# Altium PCB Revolution.PcbDoc
Units mil, origin at the board's own origin, x right, y up, seen from the top; angles counter-clockwise.
Board outline 2695 x 2794.96 mil, 2 copper layers (Top Layer, Bottom Layer), stack 61.2 mil thick; 85 components, 79 nets, 338 pads, 28 vias.
Unrouted connection lines stored in the file: 13.
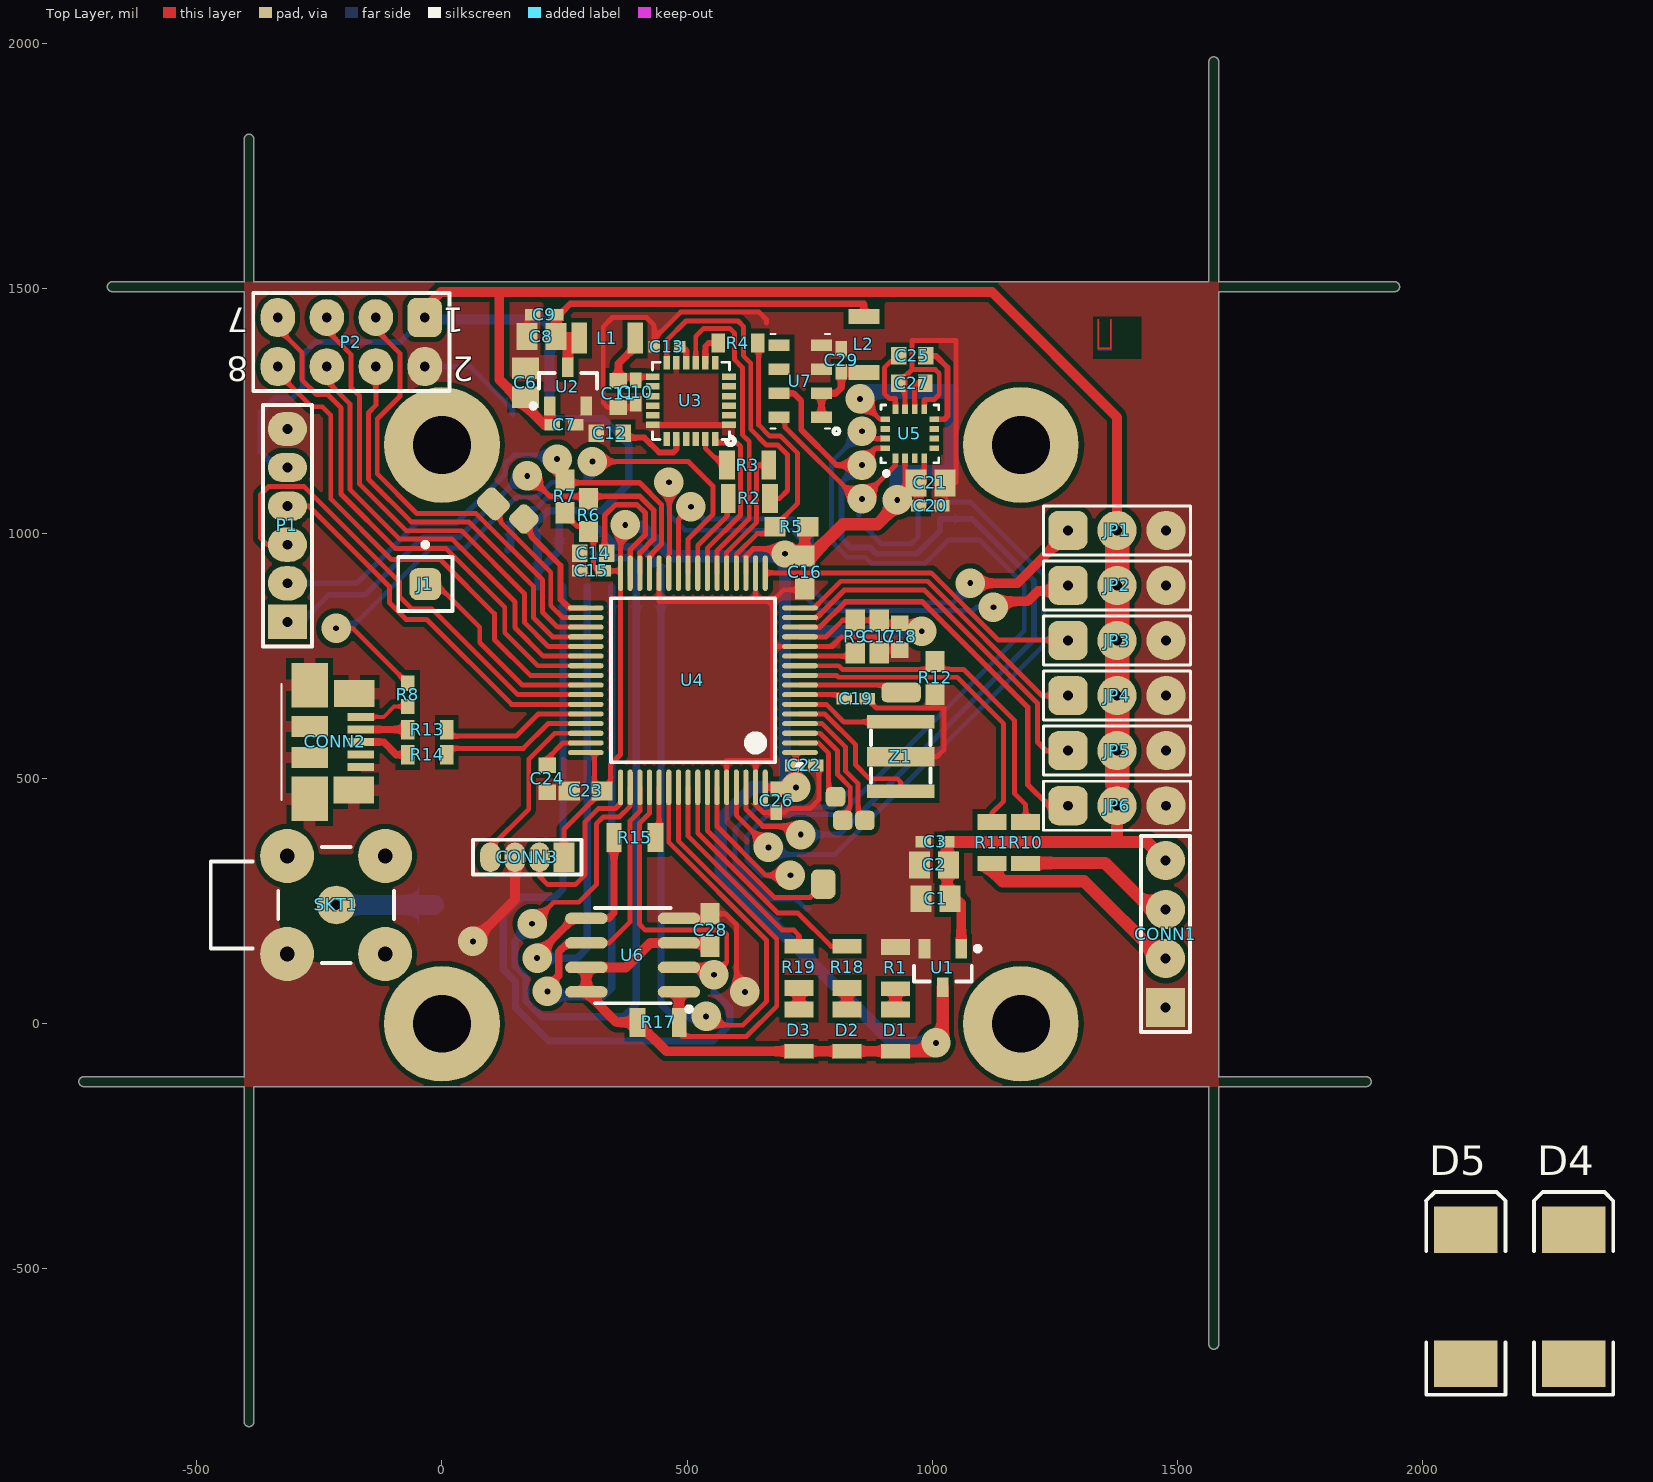
[diagram p0: Top Layer view]
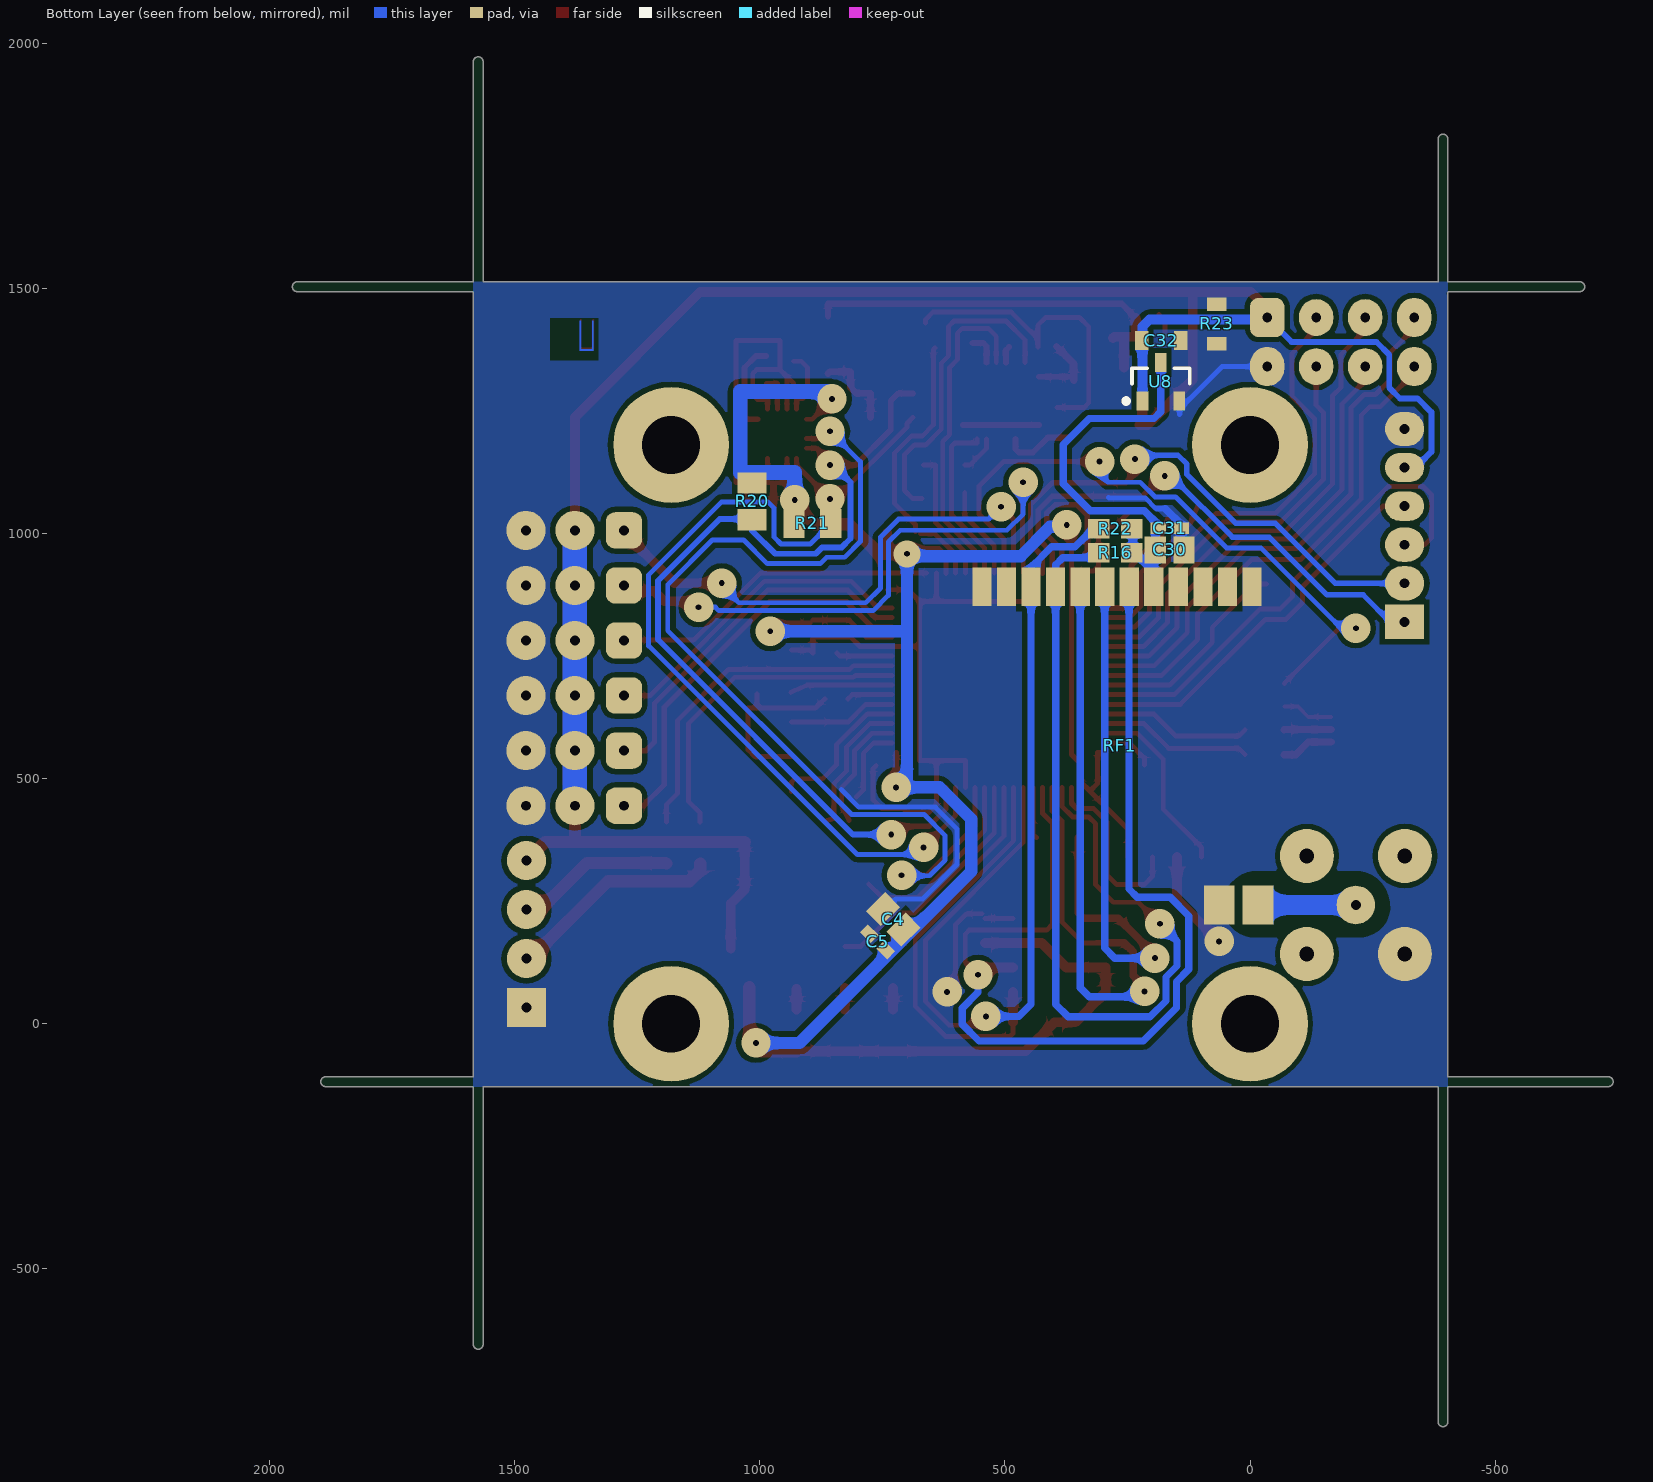
[diagram p1: Bottom Layer view, seen from below]

## Layer stack, top to bottom
Top Solder: solder mask 0.4, Solder Resist, Dk 3.5
Top Layer: signal copper 1.4
Dielectric1: core 58.4, FR-4, Dk 4.8
Bottom Layer: signal copper 1.4
Bottom Solder: solder mask 0.4, Solder Resist, Dk 3.5

## Board outline
-403.72,-812 -403.72,-128.13 -731,-128.13 cw(c-731,-118.11) -731,-108.1 -403.72,-108.1 -403.72,1493.87 -673,1493.87 cw(c-673,1503.89) -673,1513.9 -403.72,1513.9 -403.72,1805 cw(c-393.7,1805) -383.69,1805 -383.69,1513.9 1564.79,1513.9 1564.79,1963 cw(c1574.8,1963) 1584.82,1963 1584.82,1513.9 1944,1513.9 cw(c1944,1503.89) 1954.01,1503.89 cw(c1944,1503.89) 1944,1493.87 1584.82,1493.87 1584.82,-108.1 1886,-108.1 cw(c1886,-118.11) 1896.01,-118.11 cw(c1886,-118.11) 1886,-128.13 1584.82,-128.13 1584.82,-654 cw(c1574.8,-654) 1564.79,-654 1564.79,-128.13 -383.69,-128.13 -383.69,-812 cw(c-393.7,-812)

## Design rules (kind name [scope] priority, off if disabled: settings)
AcuteAngle [All] p1 off: minimum=6.00000000000000E+0001 checktracksonly=FALSE
Clearance CPWG [InNet('ANT') vs InPolygon] p1: gap=10
Clearance Clearance_osc [InNet('GND') vs InNet('OSC_IN') or InNet('OSC_OUT')] p2: gap=15
Clearance "Power Layer Pull Back" [OnLayer('Power') vs OnLayer('Keep-Out Layer')] p3: gap=30
Clearance Clearance_outline [All vs OnLayer('Keep-Out Layer')] p4: gap=12
Clearance "PWR Layer clearance" [All vs OnLayer('Power')] p5: gap=12
Clearance "VCC_UNREG Pour Clearance" [(InNamedPolygon('Top Layer-GND') OR InNamedPolygon('Bottom Layer-GND')) vs (InNet('VCC_UNREG'))] p6: gap=12
Clearance "Small Part Clearance Poly" [(HasFootprint('IMU-3000') OR HasFootprint('LPCC-16')) vs InPolygon] p7: gap=8
Clearance "Small Part Clearance" [(HasFootprint('IMU-3000') OR HasFootprint('LPCC-16'))] p8: gap=6
Clearance [All] p9: gap=5 except(10.5: Arc-Poly Track-Poly SMDPad-Poly THPad-Poly Via-Poly Fill-Poly Poly-Poly)
ComponentClearance [All] p1: gap=2 collisioncheckmode=3 verticalgap=2 showdistances=FALSE
DiffPairsRouting [All] p1: maxlimit=20 minlimit=6 mostfreqgap=10 toplayer_minwidth=15 toplayer_maxwidth=15 toplayer_prefwidth=15 bottomlayer_minwidth=15 bottomlayer_maxwidth=15 bottomlayer_prefwidth=15 maxuncoupledlength=500
HoleSize [All] p1: absolutevalues=TRUE maxlimit=1000 minlimit=12 maxpercent=80.000 minpercent=20.000
MinimumAnnularRing [All] p1: minimumring=8
MinimumSolderMaskSliver MinimumSolderMaskSliver_FIL1-3 [InComponent('FIL1') or InComponent('FIL2') or InComponent('FIL3')] p1: minsoldermaskwidth=1
MinimumSolderMaskSliver [All] p2: minsoldermaskwidth=3
PlaneClearance [All] p1: clearance=15
PlaneConnect [All] p1: planeconnectstyle=Direct reliefexpansion=20 reliefentries=4 reliefconductorwidth=10 reliefairgap=10
PolygonConnect PolygonConnect_Headers [(HasFootprint('SIP3 - 0.1')) vs IsNamedPolygon('Bottom Layer-GND')] p1: connectstyle=Relief reliefconductorwidth=12 reliefentries=4 polygonreliefangle="90 Angle" airgapwidth=10
PolygonConnect PolygonConnect_usb [HasFootprint('Micro_USB')] p2: connectstyle=Relief reliefconductorwidth=24 reliefentries=4 polygonreliefangle="90 Angle" airgapwidth=10
PolygonConnect [All] p3: connectstyle=Direct reliefconductorwidth=12 reliefentries=4 polygonreliefangle="90 Angle" airgapwidth=10
RoutingVias [All] p1: holewidth=12 width=60 viastyle="Through Hole" minholewidth=12 minwidth=50 maxholewidth=12 maxwidth=60
SilkToSilkClearance SilkToSilkClearance_text [IsText] p1: silktosilkclearance=0
SilkToSilkClearance [All] p2: silktosilkclearance=4
SilkToSolderMaskClearance SilkscreenOverComponentPads [IsPad] p1: minsilkscreentomaskgap=2 clearancetoexposedcopper=TRUE
SolderMaskExpansion [All] p1: expansion=3
Width [All] p1: maxlimit=400 minlimit=8 preferedwidth=10
22 further rules are at their usual default settings.

## Classes and differential pairs
differential pair USB_R: +USB_R_P -USB_R_N

## Components (designator, comment, footprint, x,y, rotation, side; value= is the part's Value field where it differs from the comment)
C1 "Cap805" CAP805L#1 1007,255 r180 top
C2 "Cap805" CAP805L#1 1004,324 r180 top
C3 "10n" CAP402N 1006,371 r180 top
C4 "Cap805" CAP805L#2 728,213 r45 bottom
C5 "10n" CAP402N 760,167 r45 bottom
C6 "Cap805" CAP805L#2 170,1308 r90 top
C7 "10n" CAP402N 249,1222 r0 top
C8 "Cap805" CAP805L#2 203,1402 r180 top
C9 "10n" CAP402N 209,1447 r180 top
C10 "Cap402" CAP402N 395,1289 r90 top
C11 "Cap603" CAP603L#1 360,1285 r270 top
C12 "Cap603" CAP603L#1 342,1205 r0 top
C13 "Cap402" 0402x 459,1381 r180 top
C14 "Cap603" CAP603L#1 309,960 r0 top
C15 "Cap402" CAP402N 305,924 r180 top
C16 "Cap402" ERA-0603 740,921 r90 top
C17 "10n" ERA-0603 892,790 r270 top
C18 "Cap603" CAP603L#1 934,790 r90 top
C19 "Cap402" CAP402N 844,663 r180 top
C20 "Cap402" CAP402N 996,1057 r0 top
C21 "Cap805" CAP805L#2 996.66,1103.87 r180 top
C22 "Cap402" CAP402N 739,527 r180 top
C23 "Cap402" ERA-0603 293,475 r180 top
C24 "Cap603" CAP603L#1 215,500 r90 top
C25 "Cap603" CAP603L#1 959.66,1362.87 r0 top
C26 "Cap402" CAP402N 682,455 r270 top
C27 "Cap603" CAP603L#2 958.66,1306.87 r180 top
C28 "Cap402" ERA-0603 547,191 r270 top
C29 "Cap402" CAP402N 815,1354 r90 top
C30 "Cap805" CAP805L#2 164,967 r180 bottom
C31 "10n" CAP402N 164,1011 r180 bottom
C32 "Cap402" 0603x 181,1394 r0 bottom
CONN1 "Current / Volt Sens & Sonar" HDR1X4 1476.38,33 r90 top
CONN2 "Micro USB B" Micro_USB -270,575 r270 top
CONN3 "MHDR1X4" MHDR1X4 249,340 r180 top
D1 "Green" 0805x#1 925.2,-13 r90 top
D2 "STAT" 0805x#1 826.77,-13 r90 top
D3 "WARN" 0805x#1 728.35,-13 r90 top
D4 "Diode" SMC 2309,-557 r90 top
D5 "Diode" SMC 2089,-557 r90 top
J1 "Socket" PIN1 -34,897 r0 top
JP1 "Servo out 1" "SIP3 - 0.1" 1277.36,1006.73 r0 top
JP2 "Servo out 2" "SIP3 - 0.1" 1277.36,894.38 r0 top
JP3 "Servo out 3" "SIP3 - 0.1" 1277.36,782.02 r0 top
JP4 "Servo out 4" "SIP3 - 0.1" 1277.36,669.67 r0 top
JP5 "Servo out 5 & Govenor Input" "SIP3 - 0.1" 1277.36,557.31 r0 top
JP6 "Servo out 6" "SIP3 - 0.1" 1277.36,444.96 r0 top
L1 "FB 300mA" 1206x 337,1399 r0 top
L2 "FB 300mA" 1206x 861,1386 r90 top
P1 "GPS" HDR1X6_2MM_PITCH -315.44,820 r90 top
P2 "Header 4X2" HDR2X4 -35,1441 r180 top
R1 "Res402" 0805x#1 925.2,114.5 r90 top
R2 "Res402" 0805x#1 627,1072 r0 top
R3 "Res402" 0805x#1 623.5,1140 r180 top
R4 "Res402" 0603x 604,1389 r180 top
R5 "Res402" ERA-0603 713,1014 r180 top
R6 "Res402" ERA-0603 299,1038 r270 top
R7 "Res402" ERA-0603 251,1076 r270 top
R8 "Res402" RES402N -70,671 r90 top
R9 "Res402" ERA-0603 843,790 r270 top
R10 "Res402" 0805x#1 1191,370 r90 top
R11 "Res402" 0805x#1 1122,370 r90 top
R12 "Res402" ERA-0603 1006,706 r90 top
R13 "Res402" 0603x -30,600 r180 top
R14 "Res402" 0603x -30,549 r180 top
R15 "Res402" 0805x#1 394,380 r0 top
R16 "Res402" ERA-0603 275,961 r0 bottom
R17 "Res402" 0805x#1 441,3 r180 top
R18 "Res402" 0805x#1 826.77,115 r270 top
R19 "Res402" 0805x#1 728.35,115 r270 top
R20 "Res402" 0805x#2 1016,1066 r90 bottom
R21 "Res402" 0805x#2 893,1021 r0 bottom
R22 "Res402" ERA-0603 275,1010 r180 bottom
R23 "Res402" 0603x 68,1428 r90 bottom
RF1 "RFM22B" RFM22B 614,892 r270 bottom
SKT1 "MMCX Thru hole" MCX5.08-H5 -216,242.39 r0 top
U1 "MC7805ACT" SOT23-3_L 1022,114 r270 top
U2 "MC7805ACT" SOT23-3_L 257,1300 r90 top
U3 "MPU-6000" IMU-3000 508,1271 r180 top
U4 "STM32F405RGT6" "STM32 64 Lead" 512,701 r180 top
U5 "HMC5883L" LPCC-16 954.66,1203.87 r90 top
U6 "Flash 16Mbits" SOIC8_N 389,140 r180 top
U7 "Pressure Sensor" MS5611-01BA03 731,1311 r180 top
U8 "MC7805ACT" SOT23-3_L 182,1310 r90 bottom
Z1 "AWSCR-8.00CV-T" CRYSTAL_CERAMIC 936,545 r270 top

## Footprints (in the part's own frame and the unit in brackets; to place one, negate y for a bottom-side part, rotate by r counter-clockwise, add the part's x,y. Pads: shape width x height; smd on the part's side, far side on the other; paste and mask are expansions set on the pad)
0402x [mm] "Chip Capacitor, Body 1.0x0.5mm, IPC Medium Density"
  rect 0.6x0.6 smd: 1(-0.66,0) 2(0.66,0)
  body extent -0.5,-0.25 0.5,0.25, height 0.6
0603x [mm] "Chip Resistor; Body 1.6 x 0.8 mm (LxW typ)"
  rect 0.7x1 smd: 1(-1.016,0) 2(1.016,0)
0805x#1 [mil] "Chip Resistor; Body 2 x 1.3 mm (LxW typ)"
  rect 33x59.06 smd: 1(42,0)
  rect 30x59.06 smd: 2(-43,0)
0805x#2 [mil] "Chip Resistor; Body 2 x 1.3 mm (LxW typ)"
  rect 43.31x59.06 smd: 1(37.4,0) 2(-37.4,0)
1206x [mm]
  rect 0.8x1.6 smd: 1(-1.45,0) 2(1.45,0)
CAP402N [mm] "Chip Capacitor, Body 1.0x0.5mm, IPC Medium Density"
  rect 0.8x0.6 smd: 1(-0.6,0) 2(0.6,0)
  body extent -0.5,-0.25 0.5,0.25, height 0.6
CAP603L#1 [mm] "Chip Capacitor, Body 1.6x0.8mm, IPC High Density"
  rect 0.8x0.9 smd: 1(-0.7,0) 2(0.7,0)
  body extent -0.8,-0.4 0.8,0.4, height 0.77
CAP603L#2 [mm] "Chip Capacitor, Body 1.6x0.8mm, IPC High Density"
  rect 0.762x0.9 smd: 1(-0.7,0) 2(0.7,0)
  body extent -0.8,-0.4 0.8,0.4, height 0.77
CAP805L#1 [mm] "Chip Capacitor, Body 2.0x1.3mm, IPC High Density"
  rect 1.1x1.38 smd: 1(-0.75,0) 2(0.75,0)
  body extent -1,-0.62 1,0.63, height 0.78
CAP805L#2 [mm] "Chip Capacitor, Body 2.0x1.3mm, IPC High Density"
  rect 1.1x1.4 smd: 1(-0.75,0) 2(0.75,0)
  body extent -1,-0.62 1,0.63, height 0.78
CRYSTAL_CERAMIC [mm]
  rect 0.7x3.5 smd: 1(1.8,0) 3(-1.8,0)
  rect 1x3.5 smd: 2(0,0)
  silkscreen extent -1.35,-1.55 1.35,1.55
ERA-0603 [mm] "Chip Resistor; Body 1.6 x 0.8 mm (LxW typ)"
  rect 1.1x1 smd: 1(-0.85,0) 2(0.85,0)
HDR1X4 [mil] "Connector; Header; 4 Position"
  rect 80x80 hole 20: 1(0,0)
  round 80 hole 20: 2(100,0) 3(200,0) 4(300,0)
  silkscreen extent -50,-50 350,50
HDR1X6_2MM_PITCH [mil] "Connector; Header; 6 Position"
  rect 70x80 hole 20: 1(0,0)
  oval 70x80 hole 20: 2(78.74,0) 3(157.48,0) 6(393.7,0)
  oval 60x80 hole 20: 4(236.22,0) 5(314.96,0)
  silkscreen extent -50,-50 443,50
HDR2X4 [mil] "Connector; Header; 4x2 Position"
  rrect50% 70x80 hole 20: 1(0,0)
  oval 70x80 hole 20: 2(0,100) 7(300,0) 8(300,100)
  oval 70x75 hole 20: 3(100,0) 4(100,100) 5(200,0) 6(200,100)
  silkscreen extent -50,-50 350,150
IMU-3000 [mm]
  rect 0.711x0.337 smd paste-0.03 mask+0.04: 1(-1.975,1.25) 2(-1.975,0.75) 3(-1.975,0.25) 4(-1.975,-0.25) 5(-1.975,-0.75) 6(-1.975,-1.25) 13(1.975,-1.25) 14(1.975,-0.75) 15(1.975,-0.25) 16(1.975,0.25) 17(1.975,0.75) 18(1.975,1.25)
  rect 0.337x0.711 smd paste-0.03 mask+0.04: 7(-1.25,-1.975) 8(-0.75,-1.975) 9(-0.25,-1.975) 10(0.25,-1.975) 11(0.75,-1.975) 12(1.25,-1.975) 19(1.25,1.975) 20(0.75,1.975) 21(0.25,1.975) 22(-0.25,1.975) 23(-0.75,1.975) 24(-1.25,1.975)
  silkscreen extent -2.25,-2 2,2.27, body extent -2,-2 2,2, height 0.95
LPCC-16 [mm] "Honeywell 16 lead LPCC pakcage"
  rect 0.5x0.3 smd paste-0.025 mask+0.056: 1(-1.27,0.75) 2(-1.27,0.25) 4(-1.27,-0.75) 9(1.27,-0.75) 10(1.27,-0.25) 11(1.27,0.25) 12(1.27,0.75)
  rect 0.5x0.3 smd paste-0.025 mask+0.064: 3(-1.27,-0.25)
  rect 0.3x0.5 smd paste-0.025 mask+0.056: 5(-0.75,-1.27) 6(-0.25,-1.27) 7(0.25,-1.27) 8(0.75,-1.27) 13(0.75,1.27) 14(0.25,1.27) 15(-0.25,1.27) 16(-0.75,1.27)
  silkscreen extent -2.16,-1.5 1.5,1.5, body extent -1.5,-1.5 1.5,1.5, height 0.9
MCX5.08-H5 [mm] "Connector; RF Coaxial, MCX, Thru-Hole; 5 Position; Right-Angle"
  round 2 hole 0.508: 1(0,0)
  round 2.8 hole 0.762: 2(-2.54,-2.54) 3(2.54,-2.54) 4(2.54,2.54) 5(-2.54,2.54)
  silkscreen extent -6.5,-3 3,3
MHDR1X4 [mil] "Connector; Header; 4 Position"
  rect 42x60 smd: 1(0,0)
  oval 42x60 smd: 2(50,0) 3(100,0) 4(150,0)
  silkscreen extent -35,-35 185,35
Micro_USB [mm] "Digikey WM17141CT-ND"
  rect 2.3x1.9 smd paste-0.051: 0(-2.946,0) 0(2.946,0)
  rect 1.4x2.1 smd paste-0.127: 0(-2.5,2.311) 0(2.5,2.286)
  rect 1.1x1.9 smd paste-0.203: 0(-0.8,0) 0(0.8,0)
  rect 0.425x1.38 smd mask+0.064: 1(-1.3,2.65) 2(-0.65,2.65) 3(0,2.65) 4(0.65,2.65) 5(1.3,2.65)
  silkscreen extent -3,-1.45 3,-1.45, body extent -3.99,-2.53 3.99,2.9, height 2.69
MS5611-01BA03 [mm] "MS5611-01BA03 Pressure Sensor"
  rect 1.1x0.6 smd mask+0.1: 1(-1.1,1.875) 2(-1.1,0.625) 3(-1.1,-0.625) 4(-1.1,-1.875) 5(1.1,-1.875) 6(1.1,-0.625) 7(1.1,0.625) 8(1.1,1.875)
  silkscreen extent -2.03,-2.44 1.55,2.74, body extent -1.5,-2.36 1.5,2.36, height 1.02
PIN1 [mil] "Connector; Plug"
  rrect50% 65x65 smd paste+0: 1(0,0)
  silkscreen extent -55,-55 55,86
RES402N [mm] "Chip Resistor, Body 1.1x0.5mm, IPC Medium Density"
  rect 0.8x0.7 smd: 1(-0.6,0) 2(0.6,0)
  body extent -0.5,-0.25 0.5,0.25, height 0.27
RFM22B [mm]
  rect 2x1 smd: 1(0,1.7) 2(0,2.973) 3(0,4.245) 4(0,5.518) 5(0,6.791) 6(0,8.064) 7(0,9.336) 8(0,10.609) 9(0,11.882) 10(0,13.155) 11(0,14.427) 12(0,15.7)
  rect 2x1.6 smd: 13(16.5,16) 14(16.5,14)
"SIP3 - 0.1" [mil] "Standard 0.1 3 Pin Header"
  rrect50% 80x80 / inner rrect50% 64x64 / far side rrect50% 74x74 hole 20: 1(0,0)
  round 80 hole 20: 2(100,0) 3(200,0)
  silkscreen extent -50,-50 250,50, body extent -47,-47 248,47, height 394
SMC [mm] "DO-214-AB/SMC; 2 C-Bend Leads; Body 7.9 x 5.9 mm, inc. leads (LxW)"
  rect 2.4x3.3 smd: 1(-3.475,0) 2(3.475,0)
  silkscreen extent -5.07,-2.05 5.43,2.05
SOIC8_N [mm] "8-Pin Small Outline Integrated Circuit Package (SOIC8), IPC Medium Density"
  oval 2.2x0.6 smd: 1(-2.4,1.905) 2(-2.4,0.635) 3(-2.4,-0.635) 4(-2.4,-1.905) 5(2.4,-1.905) 6(2.4,-0.635) 7(2.4,0.635) 8(2.4,1.905)
  silkscreen extent -3.05,-2.44 1.96,2.92, body extent -3.01,-2.5 3.01,2.5, height 1.75
SOT23-3_L [mm] "SOT23, 3-Leads, Body 2.9x1.3mm, Pitch 0.95mm, Lead Span 2.3mm, IPC High Density"
  rect 1x0.6 smd: 1(-1,0.95) 2(-1,-0.95) 3(1,0)
  silkscreen extent -1.12,-1.5 0.7,1.93, body extent -0.7,-1.5 0.7,1.5, height 1.2
"STM32 64 Lead" [mm] "Thin QFP, 64-Leads, Body 10x10mm, Pitch 0.5mm, IPC Medium Density"
  oval 1.85x0.265 smd mask+0.076: 1(-5.55,3.75) 2(-5.55,3.25) 3(-5.55,2.75) 4(-5.55,2.25) 5(-5.55,1.75) 6(-5.55,1.25) 7(-5.55,0.75) 8(-5.55,0.25) 9(-5.55,-0.25) 10(-5.55,-0.75) 11(-5.55,-1.25) 12(-5.55,-1.75) 13(-5.55,-2.25) 14(-5.55,-2.75) 15(-5.55,-3.25) 16(-5.55,-3.75) 33(5.55,-3.75) 34(5.55,-3.25) 35(5.55,-2.75) 36(5.55,-2.25) 37(5.55,-1.75) 38(5.55,-1.25) 39(5.55,-0.75) 40(5.55,-0.25) 41(5.55,0.25) 42(5.55,0.75) 43(5.55,1.25) 44(5.55,1.75) 45(5.55,2.25) 46(5.55,2.75) 47(5.55,3.25) 48(5.55,3.75)
  oval 0.265x1.85 smd mask+0.076: 17(-3.75,-5.55) 18(-3.25,-5.55) 19(-2.75,-5.55) 20(-2.25,-5.55) 21(-1.75,-5.55) 22(-1.25,-5.55) 23(-0.75,-5.55) 24(-0.25,-5.55) 25(0.25,-5.55) 26(0.75,-5.55) 27(1.25,-5.55) 28(1.75,-5.55) 29(2.25,-5.55) 30(2.75,-5.55) 31(3.25,-5.55) 32(3.75,-5.55) 49(3.75,5.55) 50(3.25,5.55) 51(2.75,5.55) 52(2.25,5.55) 53(1.75,5.55) 54(1.25,5.55) 55(0.75,5.55) 56(0.25,5.55) 57(-0.25,5.55) 58(-0.75,5.55) 59(-1.25,5.55) 60(-1.75,5.55) 61(-2.25,5.55) 62(-2.75,5.55) 63(-3.25,5.55) 64(-3.75,5.55)
  silkscreen extent -5.68,-4.25 4.25,4.57, body extent -6.01,-5.99 5.99,6.01, height 1.7

## Part data
C1 C2 C4 C6 C8 C10 C11 C12 C13 C14 C15 C16 C18 C19 C20 C21 C22 C23 C24 C25 C26 C27 C28 C29 C30 C32: "Capacitor SMD"
C3 C5 C7 C9 C17 C31: library part Cap402, "Capacitor SMD"
CONN1: library part "JST-SH 4-pin Side Entry Socket", "JST-SH 4-pin Side Entry Socket"
CONN2: library part "USB Micro B SMT", "USB Micro B SMT Socket"
CONN3: "Header, 4-Pin"
D1: library part "LED 603 Gr", "Green 603 LED"
D2: library part "LED 603 Bl", "Blue 603 LED"
D3: library part "LED 603 Or", "Orange 603 LED"
D4 D5: "Default Diode"
JP1 JP2 JP3 JP4 JP5 JP6: library part "Hdr 3 Pin 0.1", "Header, 3-Pin, 0.1\""
L1 L2: library part "FerriteBead 300mA", "Ferrite Bead 300mA"
P1: library part "Header 6", "Header, 6-Pin"
P2: "Header, 4-Pin, Dual row"
R1 R2 R3 R4 R5 R6 R7 R8 R9 R10 R11 R12 R13 R14 R15 R16 R17 R18 R19 R20 R21 R22 R23: "Resistor SMD"
RF1: library part RFM22B-S2, "UHF 100mW Transceiver"
SKT1: "MMCX Socket"
U1 U2 U8: "3-Terminal Positive Fixed Voltage Regulator"
U3: library part MPU-3/6000, "Invensense MPU-3/6000,  3-axis Gyros & Accel on 6000"
U4: library part STM32F103RET6, "STM32 ARM-based 32-bit MCU with 1MB Flash, 64-pin LQFP, Industrial Temperature"
U5: "IC, Magnetometer, 3 axis, +/- 8 Oe, I2C, 160Hz"
U6: library part "Flash 16Mb 75MHZ 8SOIC", "16Mbit SPI Flash Memory"
U7: library part MS5611-01BA03, "Pressure Sensor - MS5611-01BA03"
Z1: library part Crystal_smd_with_caps

## Free pads (board coordinates)
  round 236.22 hole 118.11: 0(0,0) 0(0,1181.1) 0(1181.1,0) 0(1181.1,1181.1)
  rrect50% 50x60 smd rot 45: 2(105,1061)
  rrect50% 50x50 smd rot 45: 2(167,1030)
  rrect50% 50x60 smd: 2(778,285)
  rrect50% 40x40 smd: 2(803,463) 2(818,415) 2(863,415)
  rrect50% 80x40 smd: 2(937,676)

## Via types
v1: diameter 60, hole 12, Top Layer to Bottom Layer, 27 vias
v2: diameter 55, hole 12, Top Layer to Bottom Layer, 1 vias

## Nets (pads, with @x,y where several pads share a name; then routed paths per layer and width w, separated by ;. In a path a pad name is that pad's centre, name@x,y a point inside that pad or via, vN(x,y) a via of type N, cw(c..) or ccw(c..) an arc to the next point about the centre after c; other vN are vias at no path point)
ANT: RF1.13 SKT1.1 | length 200.1
  Bottom Layer w40: SKT1.1 RF1.13
CURRENT: R11.1 U4.9 | length 666.4
  Top Layer w10: U4.9 805.16,710.84 809,707 1051,707 1146,612 1146,454 1122,430 R11.1
FN1: pad.2@778,285 U4.58 | length 392.2
  Top Layer w10: U4.58 541.53,394.47 678,258 751,258 pad.2@778,285
FN2: pad.2@863,415 U4.4 | length 283.5
  Top Layer w10: U4.4 775.58,612.42 823,565 823,516 849,490 849,419 pad.2@863,415
FN3: pad.2@818,415 U4.3 | length 247.7
  Top Layer w10: U4.3 771.27,592.73 807,557 807,509 833,483 833,444 pad.2@818,415
FN4: pad.2@803,463 U4.2 | length 162
  Top Layer w10: U4.2 767.95,573.05 789,552 789,477 pad.2@803,463
FN5: pad.2@937,676 U4.8 | length 209.8
  Top Layer w10: U4.8 903.84,691.16 pad.2@937,676
GND: C1.2 C2.2 C3.2 C4.2 C5.2 C6.2 C7.2 C8.2 C9.2 C10.1 C11.2 C12.1 C13.2 C14.1 C15.2 C16.1 C17.2 C18.1 C19.1 C20.2 C21.1 C22.1 C23.2 C24.1 C26.2 C27.2 C28.1 C29.2 C30.2 C31.2 C32.1 CONN1.1 CONN2.0 CONN2.5 CONN3.3 JP1.3 JP2.3 JP3.3 JP4.3 JP5.3 JP6.3 P1.6 P2.2 R1.1 R12.1 R23.1 R23.2 RF1.1 RF1.2 RF1.12 RF1.14 SKT1.2 U1.2 U2.2 U3.1 U3.11 U3.18 U4.12 U4.18 U4.28 U4.60 U4.63 U5.9 U5.11 U6.4 U7.3 U7.4 U8.2 Z1.2 | length 4954.9
  Top Layer w10: C8.2 173.47,1435.09 C9.2 ; C10.1@393.56,1257.44 C11.2 338.56,1257.44 329,1267 329,1422 348,1441 417,1441 433,1425 433,1398 ; C13.2 433,1398 ; U4.28 443.1,862 639.95,862 ; U6.4 C28.1@541,215 ; C28.1 578.54,224.46 601,202 601,82 v1(618,65) ; U4.60 580.9,537 639.95,537 ; U4.18 639.95,862 ; 662,1430 662,1437 647,1452 487,1452 433,1398 ; C16.1@740,885.54 697.54,885.54 674,862 ; C22.1 769,520.62 769,457 751,439 707,439 699.38,431.38 655,431.38 639.95,446.43 U4.63 639.95,537 ; C19.1 886.62,644 1006,644 ; C27.2 C27.2@944.82,1320.59 ; Z1.2 1010,545 1024,559 1024,644 1006,644 ; C18.1@936,762.44 897.91,762.44 C17.2 892,789 815,789 795.9,769.9 U4.12 674,769.9 ; U5.11 C27.2@944.82,1320.59 ; U5.9 984.19,1273.87 1004.66,1273.87 1014.66,1283.87 1014.66,1326.87 1006.66,1334.87 959.1,1334.87 ; R12.1 1006,644 ; C20.2@1026.19,1063.57 C21.1 1048.66,1103.87 1048.66,1393.87 959.1,1393.87 959.1,1334.87 ; 639.95,537 674,537 674,769.9 ; 639.95,862 674,862 ; 674,769.9 674,862 ; C27.2@944.82,1320.59 959.1,1334.87
  Top Layer w12: U3.18 U3.1
  Top Layer w20: v1(63,168) 149,254 CONN3.3
  Bottom Layer w10: P2.2 57,1341 143.6,1254.4 143.6,1242.63 ; 173,1051 192,1051 214,1073 288,1073 289,1074 ; C4.2 743.12,233.88 722,255 668,255 598,325 598,398 642,442 798,442 834,478
  Bottom Layer w15: C30.2 140.38,972.91 C31.2 140.38,1018.38 173,1051
NetC10_2: C10.2 C11.1 L1.2 U3.13 | length 146.5
  Top Layer w12: C11.1@367.65,1320.21 U3.13
  Top Layer w15: C11.1 360,1347 L1.2@395,1382
NetC12_2: C12.2 U3.20 | length 147.8
  Top Layer w12: C12.2@366.56,1196 413,1196 443,1166 472,1166 478.47,1172.47 U3.20
NetC13_1: C13.1 U3.10 | length 35
  Top Layer w12: C13.1@491.62,1381 498.16,1374.47 U3.10
NetC14_2: C14.2 U4.31 | length 315.4
  Top Layer w11: C14.2 332,964.56 332,1037 354,1059 398,1059 415,1042 415,998 384.05,967.05 U4.31 U4.31@384.05,917.5
NetC24_2: C24.2 U4.47 | length 105.2
  Top Layer w10: C24.2 215,541 247.05,573.05 U4.47
NetC25_1: C25.1 U5.12 | length 135.4
  Top Layer w10: U5.12 925.13,1275.87 912.66,1275.87 902.66,1285.87 902.66,1338.87 915.66,1351.87 C25.1@931.1,1351.87
NetC25_2: C25.2 U5.8 | length 183.1
  Top Layer w12: C25.2 1007.66,1362.87 1031.66,1338.87 1031.66,1239.87 1025.19,1233.4 U5.8
NetC27_1: C27.1 U5.10 | length 74.7
  Top Layer w10: U5.10 964.5,1306.87 C27.1
NetC29_1: C29.1 L2.1 U7.1 U7.2 | length 174.5
  Top Layer w14: U7.1 U7.2 803.39,1286.39 815,1298 C29.1 857.54,1330.38 L2.1@861,1326.91
NetCONN1_2: CONN1.2 R11.2 | length 442.9
  Top Layer w25: R11.2 1122,313 1144,291 1310,291 1468,133 CONN1.2
NetCONN1_3: CONN1.3 R10.2 | length 325.1
  Top Layer w25: R10.2 1192,328 1353,328 1448,233 CONN1.3
NetD1_1: D1.1 R1.2 | length 42.5
  Top Layer w20: D1.1 R1.2
NetD2_1: D2.1 R18.1 | length 44
  Top Layer w20: D2.1 R18.1
NetD3_1: D3.1 R19.1 | length 44
  Top Layer w20: D3.1 R19.1
NetR2_1: R2.1 U3.12 | length 651.4
  Top Layer w10: U3.12 458.79,1394.79 498,1434 604,1434 615,1423 615,1363 630,1348 630,1213 662,1181 685,1181 705,1161 705,1088 689,1072 R2.1
NetR2_2: R2.2 U4.24 | length 189.3
  Top Layer w10: U4.24 521.84,975.84 582,1036 R2.2@582,1083.91
NetR3_1: R3.1 U3.23 | length 77
  Top Layer w10: U3.23 537.53,1174.47 572,1140 R3.1
NetR3_2: R3.2 U4.21 | length 270.3
  Top Layer w10: U4.21 580.9,961.9 642,1023 642,1140 R3.2
NetR4_1: R4.1 R5.2 U4.20 | length 567
  Top Layer w10: U4.20 600.58,957.58 643,1000 R5.2@672.54,1000 ; R4.1@643,1379 646,1376 646,1222 669,1199 691,1199 725,1165 725,1061 682.54,1018.54 R5.2@682.54,1004
NetR4_2: R4.2 U3.8 | length 64.9
  Top Layer w12: U3.8 537.53,1382.53 544,1389 R4.2@566,1389
NetR9_2: R9.2 U4.11 | length 115.1
  Top Layer w10: U4.11 836.68,750.21 R9.2
NetR15_1: R15.1 U4.53 | length 105.4
  Top Layer w10: R15.1 443.1,387.1 U4.53
NetR15_2: R15.2 RF1.6 U6.5 | length 1215.6
  Top Layer w15: v1@179.5,125.5 269,215 U6.5 340,215 351,226 R15.2
  Bottom Layer w15: v1(194,134) 276,134 296.53,154.53 RF1.6
NetR16_2: R16.2 RF1.4 U4.50 | length 1836.3
  Top Layer w10: v1(184,204) 228,248 279,248 315,284 315,408 329,422 362,422 384.05,444.05 U4.50
  Bottom Layer w15: v1(184,204) 149,169 149,118 171.5,95.5 171.5,46.5 204,14 371,14 396.75,39.75 RF1.4 396.75,936.25 382,951 318.46,951 R16.2
NetR17_2: R17.2 U4.55 U6.1 | length 841.9
  Top Layer w10: U4.55 482.47,373.53 683,173 683,36 621,-26 490,-26 484,-20 R17.2 R17.2@483.49,3.51
  Top Layer w20: R17.2@483.49,3.51 U6.1
NetR20_2: R20.2 U4.62 U5.16 U7.7 | length 1940.9
  Top Layer w10: U4.62 620.27,437.73 655,403 ; v1@850,1140 884.35,1174.35 U5.16
  Top Layer w12: 655,403 721,403 732,392 v1(732,386) ; U7.7 717.61,1286.39 733,1271 733,1212 805,1140 850,1140 v1(857,1140)
  Bottom Layer w12: v1(732,386) 810,386 1208,784 1208,904 1082,1030 1017.4,1030 R20.2 1016,1006 969,959 886,959 873,972 833,972 815,990 815,1105 v1@850,1140
NetR21_2: R21.2 U4.61 U5.1 U7.8 | length 1949.1
  Top Layer w10: U4.61 600.58,425.42 v1(666,360) ; U7.8 700,1224.87 700,1217 846,1071 v1(857,1071) ; v1@862,1071 862,1076 925.13,1139.13 U5.1
  Bottom Layer w10: v1(666,360) 681,345 801,345 1227,771 1227,916 1078,1065 984,1065 971,1052 971,993 957,979 897.6,979 R21.2 ; R21.2@850.6,1037.4 850.6,1059.6 v1@862,1071
NetR22_1: R22.1 RF1.3 U4.54 | length 1837
  Top Layer w10: U4.54 462.79,370.21 662,171 662,45 614,-3 557,-3 v1(539,15)
  Bottom Layer w10: v1(539,15) v1@541,15
  Bottom Layer w15: R22.1 320,1010 357,973 405,973 446.86,931.14 RF1.3 446.86,40.14 472,15 v1(539,15)
NetRF1_5: RF1.5 U4.51 U6.6 | length 1510.1
  Top Layer w10: U6.6 341,165 384,208 384,414 403.73,433.73 U4.51
  Top Layer w15: v1(215,66) 215,67 211,71 238,98 238,147 256,165 U6.6
  Bottom Layer w15: v1(215,66) 226,55 328,55 346.64,73.64 RF1.5
NetRF1_7: RF1.7 U4.52 U6.2 | length 2199.2
  Top Layer w10: U4.52 423.42,429.42 403,409 403,203 415,191 573,191 581,183 581,126 v1(555,100)
  Top Layer w20: U6.2 541,115 555,101 v1(555,100)
  Bottom Layer w15: RF1.7 247,891.43 247,275 230,258 163,258 125,220 125,111 150,86 150,33 218,-35 553,-35 587,-1 587,32 555,64 v1(555,100)
NetU3_9: U3.9 U4.22 | length 673.3
  Top Layer w10: U3.9 517.84,1402.84 534,1419 587,1419 597,1409 597,1355 613,1339 613,1202 627,1188 627,1031 561.21,965.21 U4.22
NetU3_24: U3.24 U4.23 | length 349.4
  Top Layer w10: U4.23 541.53,970.53 609,1038 609,1178 602,1185 557.21,1185 U3.24
NetU4_5: U4.5 Z1.1 | length 306
  Top Layer w10: U4.5 780.9,632.1 844,569 844,528 872,500 929,500 936,493 Z1.1
NetU4_6: U4.6 Z1.3 | length 220.4
  Top Layer w10: U4.6 784.21,651.79 820.13,615.87 Z1.3
NetU4_59: U4.59 U5.15 | length 2039.2
  Top Layer w10: U4.59 561.21,402.79 661,303 v1(711,303) ; v1(857,1209) 857,1194.03 U5.15
  Bottom Layer w10: v1(711,303) 710,302 654,302 622,334 622,384 665,427 813,427 1188,802 1188,896 1097,987 1033,987 985,939 877,939 864,952 827,952 795,984 795,1147 v1(857,1209)
NRST: C19.2 U4.7 | length 93.4
  Top Layer w10: U4.7 811.91,671.47 C19.2
"PB12 = SPI2 NSS, CAN2 RX": pad.2@167,1030 U4.33 | length 250.4
  Top Layer w12: pad.2@167,1030 184,993 242,935 242,866 259.36,848.64 U4.33
"PB13 = SPI2 SCK, CAN2 TX, USART3 CTS": pad.2@105,1061 U4.34 | length 334.3
  Top Layer w10: pad.2@105,1061 122,1021 222,921 222,853 246.05,828.95 U4.34
S1_IN: P2.3 U4.35 | length 952
  Top Layer w10: P2.3 -135,1417 -86,1368 -86,1280 -132,1234 -132,1122 -51,1041 70,1041 205,906 205,840 235.73,809.27 U4.35
S2_IN: P2.4 U4.36 | length 850.3
  Top Layer w10: P2.4 -135,1262 -150,1247 -150,1111 -63,1024 55,1024 187,892 187,828 225.42,789.58 U4.36
S3_IN: P2.5 U4.37 | length 1001
  Top Layer w10: P2.5 -235,1415 -186,1366 -186,1299 -168,1281 -168,1101 -73,1006 40,1006 168,878 168,819 217.1,769.9 U4.37
S4_IN: P2.6 U4.38 | length 923.2
  Top Layer w10: P2.6 -235,1312 -188,1265 -188,1091 -86,989 21,989 149,861 149,808 206.79,750.21 U4.38
S5_IN: P2.7 U4.39 | length 1102
  Top Layer w10: P2.7 -335,1419 -286,1370 -286,1314 -256,1284 -233,1284 -206,1257 -206,1081 -95,970 8,970 128,850 128,798 195.47,730.53 U4.39
S6_IN: P2.8 U4.40 | length 1028.3
  Top Layer w10: P2.8 -335,1328 -266,1259 -244,1259 -227,1242 -227,1071 -103,947 -3,947 107,837 107,784 180.16,710.84 U4.40
SCL: P1.2 R7.1 U4.29 | length 1092.8
  Top Layer w11: v1(235,1152) 235,1122.46 253.46,1104 403,1104 448,1059 448,979 423.42,954.42 U4.29
  Bottom Layer w11: P1.2 -174.26,898.74 -52,1021 29,1021 129,1121 129,1142 147,1160 227,1160 v1(235,1152)
SDA: P1.1 R6.1 U4.30 | length 1035.9
  Top Layer w11: v1@177,1113 183,1113 220,1076 404,1076 432,1048 432,989 403.73,960.73 U4.30
  Bottom Layer w11: P1.1 -286,820 -231,875 -157,875 -39,993 36,993 156,1113 v1@177,1113
  other v1: 174,1118
SERVO_OUT_1: JP1.1 U4.26 | length 1169
  Top Layer w10: U4.26 482.47,1029.47 v1(508,1055) ; JP1.1@1277.36,1002.36 JP1.1
  Top Layer w20: v1(1078,899) 1174,899 JP1.1@1277.36,1002.36
  Bottom Layer w10: v1(508,1055) 533,1030 717,1030 754,993 754,889 784,859 1043,859 1091,907 1082,916 1078,912 v1(1078,899)
SERVO_OUT_2: JP2.1 U4.27 | length 1232.5
  Top Layer w10: U4.27 462.79,957.79 464,959 464,1104 v1(463,1105)
  Top Layer w20: v1(1125,850) 1137,862 1195,862 1216,883 1265.98,883 JP2.1
  Bottom Layer w10: v1(463,1105) 463,1040 496,1007 714,1007 738,983 738,874 769,843 1084,843 1091,850 v1(1125,850)
SERVO_OUT_3: JP3.1 U4.17 | length 674.5
  Top Layer w10: U4.17@660,920 998,920 1135,783 1276.39,783 JP3.1
SERVO_OUT_4: JP4.1 U4.16 | length 671.5
  Top Layer w10: U4.16 759.64,848.64 814,903 991,903 1224.33,669.67 JP4.1
  Top Layer w11: JP4.1@1263.27,686.73 JP4.1@1268.73,686.73
SERVO_OUT_5: JP5.1 U4.15 | length 752.1
  Top Layer w11: U4.15 764.95,828.95 821,885 984,885 1215,654 1215,575 1232.69,557.31 JP5.1
SERVO_OUT_6: JP6.1 U4.14 | length 833.2
  Top Layer w11: U4.14 771.27,809.27 823,861 980,861 1195,646 1195,488 1238.04,444.96 JP6.1
SONAR: J1.1 U4.41 | length 430.9
  Top Layer w10: J1.1 -11,897 77,809 77,778 163.84,691.16 U4.41
STAT: R18.2 U4.57 | length 494
  Top Layer w10: U4.57 521.84,389.16 685,226 726,226 794,158 R18.2
SWDCLK: CONN3.2 U4.49 | length 376.3
  Top Layer w10: CONN3.2 199,301 216,284 272,284 292,304 292,412 319,439 354,439 364.36,449.36 U4.49
SWDIO: CONN3.4 U4.46 | length 370.6
  Top Layer w10: CONN3.4 99,360 177,438 177,540 229.73,592.73 U4.46
TO_REGS: C1.1 C2.1 C3.1 C6.1 C7.1 C32.2 D4.2 D5.2 P1.5 U1.1 U2.1 U8.1 | length 5042.4
  Top Layer w20: -46,1441 -33,1454 -33,1462 -2,1493 1122,1493 1377.36,1237.64 1377.36,1006.73 ; 117,1480 117,1314 209,1222 C7.1 219.6,1227.78 U2.1 ; C3.1@1031,371 1031,274 1059.4,245.6 U1.1 ; 1377.36,444.96 1377.36,491.96
  Top Layer w25: C3.1@1031,371 1377.36,371 ; 1377.36,444.96 1377.36,371 ; 1476.38,333 1438.38,371 1377.36,371
  Top Layer w50: 1377.36,491.96 1377.36,557.31 1377.36,669.67 1377.36,782.02 1377.36,894.38 1377.36,1006.73
  Bottom Layer w12: P1.5 -337.96,1134.96 -370,1167 -370,1248 -342,1276 -306,1276 -284,1298 -284,1365 -258,1391 -85,1391 -35,1441
  Bottom Layer w20: -35,1441 -31,1437 205,1437 219.4,1422.6 U8.1@219.4,1273
  Bottom Layer w50: 1377.36,444.96 1377.36,557.31 1377.36,669.67 1377.36,782.02 1377.36,894.38 1377.36,1006.73
UART1_RX: P1.4 U4.43 | length 795.8
  Top Layer w10: P1.4 -271.22,1056.22 -107,892 -107,859 -73,825 -31,825 142.21,651.79 U4.43
UART1_TX: P1.3 U4.42 | length 1012.7
  Top Layer w10: P1.3 -356.48,977.48 -370,991 -370,1080 -354,1096 -281,1096 -87,902 -87,872 -61,846 -20,846 154.53,671.47 U4.42
USB_D_N: R13.1 U4.44 | length 307.6
  Top Layer w10: R13.1 23,587 151,587 196.1,632.1 U4.44
USB_D_P: R14.1 U4.45 | length 309.8
  Top Layer w10: R14.1 23,562 166,562 216.42,612.42 U4.45
USB_PWR: CONN2.1 D5.1 R8.1 | length 104.4
  Top Layer w8: CONN2.1 -118.82,626.18 -97.62,647.38 R8.1
USB_R_N: CONN2.2 R13.2 | length 95.9
  Top Layer w15: CONN2.2 -70.59,600.59 R13.2
USB_R_P: CONN2.3 R14.2 | length 106.4
  Top Layer w15: CONN2.3 -119,575 -93,549 R14.2
VBUS_SEN: R8.2 U4.25 | length 1350.7
  Top Layer w10: v1(-216,807) -182.38,807 R8.2 ; v1(307,1147) 307,1154 306,1155 307,1156 316,1147 503,1147 553,1097 553,1040 502.16,989.16 U4.25
  Bottom Layer w10: v1(-216,807) -186,807 -22,971 48,971 152,1075 194,1075 224,1105 290,1105 307,1122 306,1123 307,1124 v1(307,1147)
VCC: C4.1 C5.1 C15.1 C16.2 C17.1 C18.2 C20.1 C21.2 C22.2 C23.1 C26.1 C28.2 CONN3.1 D1.2 D2.2 D3.2 R5.1 R6.2 R7.2 R9.1 R17.1 R20.1 R21.1 U1.3 U4.1 U4.13 U4.19 U4.32 U4.48 U4.64 U5.2 U5.4 U5.13 U6.3 U6.7 U6.8 | length 5906.3
  Top Layer w10: R7.2@248,1042.54 276,1014.54 297,1014.54 309,1002.54 309,934 319,924 C15.1@332.62,924 ; CONN3.1 249,397 326.46,474.46 C23.1 ; U4.48 311,553.36 311,490.46 C23.1 ; C15.1@335.62,924 364.36,924 U4.32 ; v1@375,1018 364.36,1007.36 U4.32 ; U4.13 783.58,789.58 817.46,823.46 R9.1 C17.1 ; R5.1@740,1001.54 R5.1@742.46,1004 ; v1@858,1269 893.6,1233.4 U5.13 ; C17.1@897.91,817.56 C18.2 v1@958.44,817.56 ; v1(929,1069) 942.62,1069 944.82,1071.2 944.82,1103.87 ; U5.2 944.82,1103.87 ; C21.2 944.82,1103.87 ; C21.2@972.38,1103.87 984.19,1103.87 U5.4 ; C23.1 344,492.54 344,529 364.36,549.36 U4.32
  Top Layer w11: U4.19 620.27,954.27 635,969 C16.2@740,969 ; U4.64 v1(722,482.5) U4.1@722,553.36
  Top Layer w15: C20.1 C21.2@972.38,1098.63
  Top Layer w20: C28.2@541,165 U6.3 425,165 375,115 U6.7 U6.8 356.51,3 R17.1 458,-56 D3.2 D2.2 D1.2 ; C16.2@740,969 R5.1@740,1001.54
  Top Layer w25: v2(700,959) 758,959 818,1019 888,1019 929,1060 v1(929,1069) ; D1.2 1001,-56 1008,-49 v1(1008,-39) 1018,-39 1022,-35 U1.3
  Bottom Layer w25: v1@387,1014 408,1014 468,954 v2@695,954 ; v2(700,959) 700,800 ; v1(979,801) 701,801 700,800 ; v1(1008,-39) 919,-39 569,311 569,418 633.5,482.5 v1(722,482.5) 700,482.5 700,800
  Bottom Layer w30: v1(853,1275) 853,1290 1040,1290 1040,1125 929,1125 v1(929,1069)
  other v1: 374,1018
VCC_ANA: C8.1 C9.1 L1.1 L2.2 U2.3 | length 815.2
  Top Layer w12: C9.1@233,1440 262,1469
  Top Layer w13: 262,1469 861,1469 L2.2
  Top Layer w20: C8.1 C8.1@233,1402 ; C9.1@233,1440 C8.1@233,1402 ; U2.3 257,1402 ; L1.1 276.91,1402 257,1402 ; C8.1@233,1402 257,1402
VCC_RMF: C30.1 C31.1 R16.1 R22.2 RF1.8 U8.3 | length 879.6
  Bottom Layer w15: U8.3 182,1249 196,1235 328,1235 381,1182 381,1102 326,1047 216,1047 187.62,1018.62 C31.1 193.53,1005.09 C30.1 196.32,964.21 RF1.8@196.32,922.32 ; RF1.8 RF1.8@196.32,922.32 ; R22.2@239,1019 239,965 RF1.8@196.32,922.32
VCC_UNREG: CONN1.4 D4.1 JP1.2 JP2.2 JP3.2 JP4.2 JP5.2 JP6.2 P2.1
"VOLT / SONAR": R10.1 R12.2 U4.10 | length 700.2
  Top Layer w10: U4.10 809.47,730.53 817,723 1064,723 1168,619 1168,470 1191,447 R10.1
WARN: R19.2 U4.56 | length 432.2
  Top Layer w10: U4.56 502.16,382.84 694,191 718,191 728.35,180.65 R19.2
pads on no net: CONN2.4 RF1.9 RF1.10 RF1.11 SKT1.3 SKT1.4 SKT1.5 U3.2 U3.3 U3.4 U3.5 U3.6 U3.7 U3.14 U3.15 U3.16 U3.17 U3.19 U3.21 U3.22 U5.3 U5.5 U5.6 U5.7 U5.14 U7.5 U7.6

## Polygon pours and split planes (outlines as drawn)
GND on Top Layer "Top Layer-No Net" (solid, remove dead copper, pour order 15): -403.72,-128.13 -403.72,-108.1 -403.72,1493.87 cw(c-403.72,1490.44) -403.72,1487 -403.72,1513.9 -383.69,1513.9 1564.79,1513.9 1584.88,1513.84 1584.88,1493.94 1584.82,-108.1 1584.82,-128.12 1564.79,-128.13
GND on Bottom Layer "Top Layer-No Net" (solid, remove dead copper, pour order 19): -403.72,-128.13 -403.72,-108.1 -403.72,1493.87 cw(c-403.72,1490.44) -403.72,1487 -403.72,1513.9 -383.69,1513.9 1564.79,1513.9 1584.88,1513.84 1584.88,1493.94 1584.82,-108.1 1584.82,-128.12 1564.79,-128.13

## Other copper
Top Layer:
  pour cut-out: 889.66,1267.87 889.66,1140.87 1018.66,1140.87 1018.66,1267.87
  pour cut-out: 867,630 867,461 1015.83,461 1016.11,526 995.55,526 995.55,565.45 1016.28,565.45 1016.11,630 1005,630
  pour cut-out: -234,346 ccw(c-234,246) -334,246 -334,224 ccw(c-234,224) -234,124 -197,124 ccw(c-197,224) -97,224 -97,246 ccw(c-197,246) -197,346
  text "" at 1334,1350 h137.8
Bottom Layer:
  pour cut-out: 889.66,1267.87 889.66,1140.87 1018.66,1140.87 1018.66,1267.87
  pour cut-out: -287,240 ccw(c-223,240) -223,176 -9,176 ccw(c-9,241) 56,241 56,242 ccw(c-14,242) -14,312 -215,312 ccw(c-215,241) -286,241
  text "" at 1335,1347 h137.8

## Silkscreen, mask and mechanical layers (free items; w line width, h text height)
Mechanical 16:
  lines w11: 102,999 102,724 277,724 277,999

## Text inside footprints (layer, text, board x,y; h text height)
P2: Top Overlay "2" at 65,1361 h50 r180; Top Overlay "1" at 45,1461 h50 r180; Top Overlay "7" at -395,1461 h50 r180; Top Overlay "8" at -395,1361 h50 r180